# EAGLE board afron_atmega328_PTH (EAGLE 6.1)
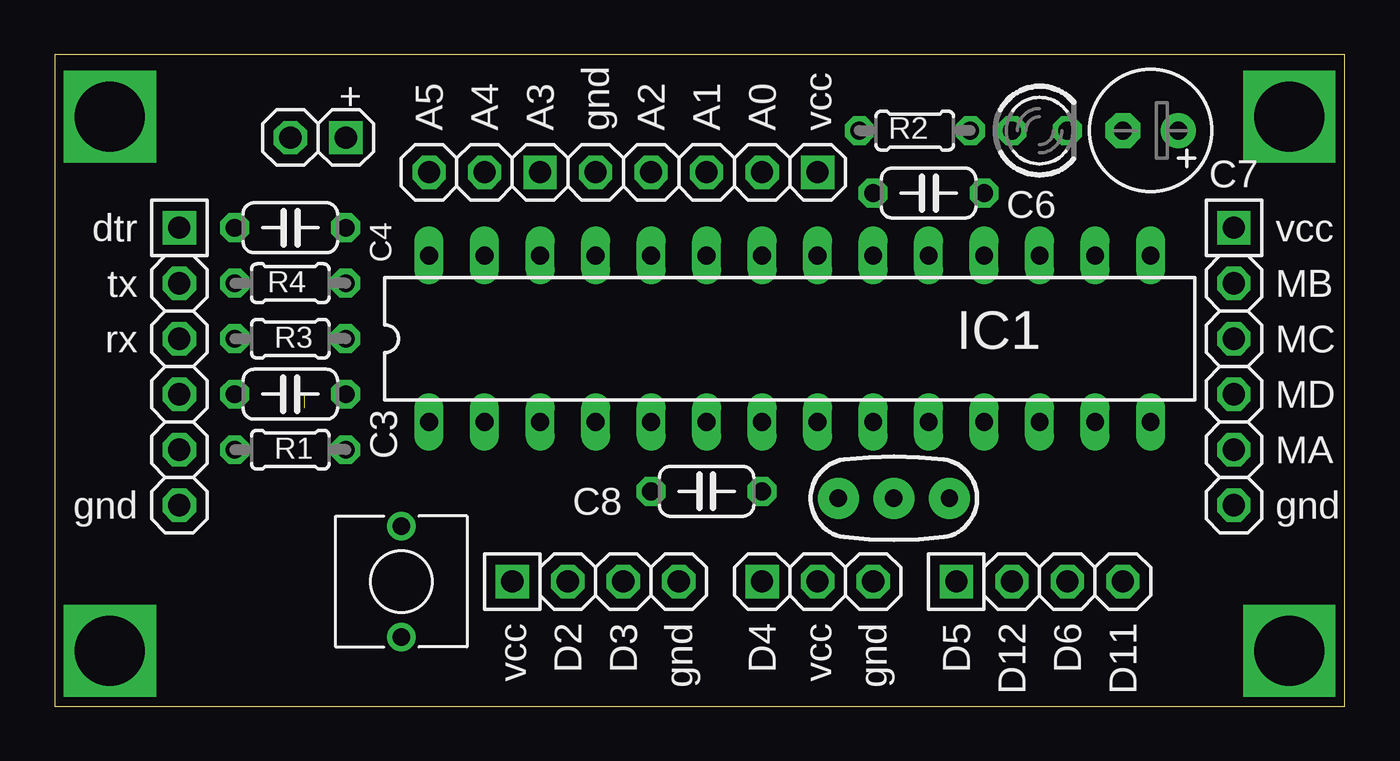
[diagram p0: board, top side]
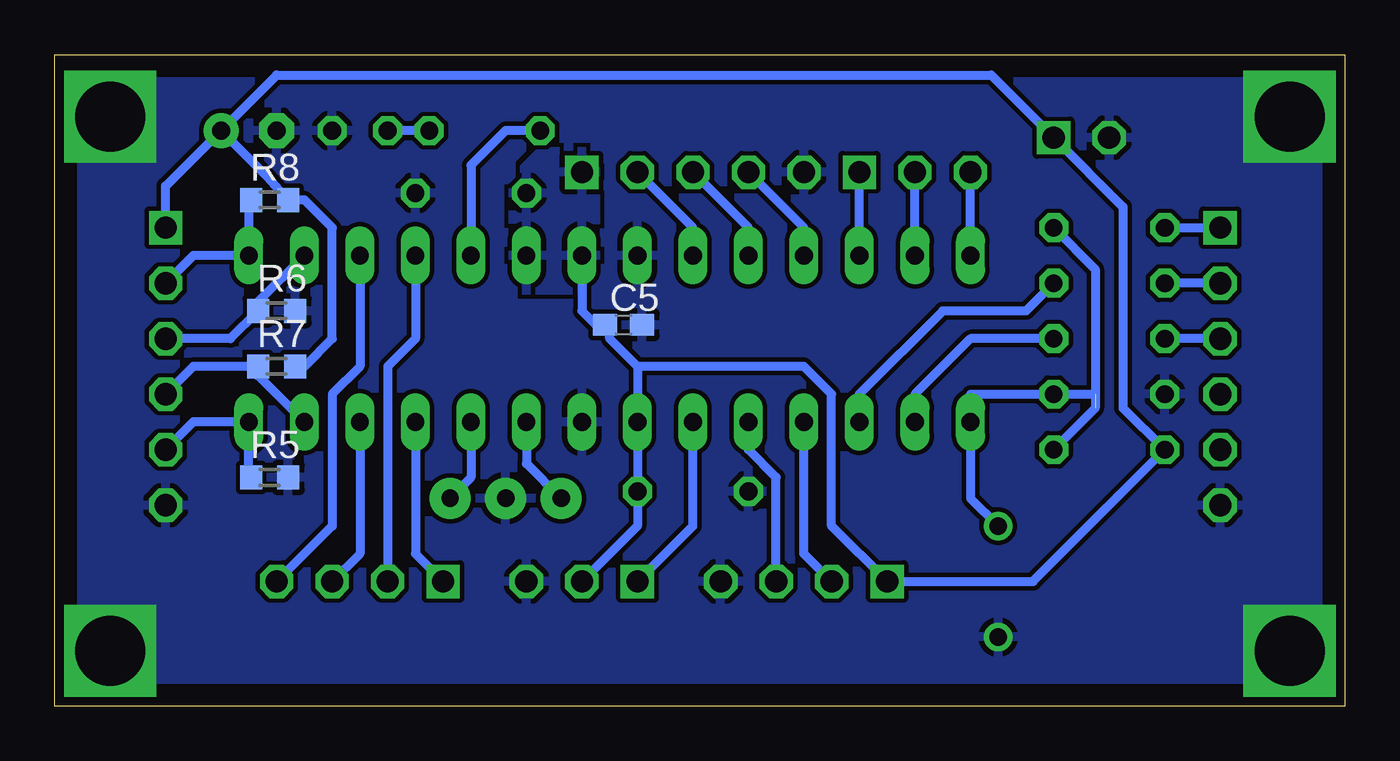
[diagram p1: board, bottom side, seen from below]

Size 59.05 x 29.83 mm. Coordinates in mm from the lower left corner, seen from the top.
Outline: 59.05,0 59.05,29.83 0,29.83 0,0 59.05,0
Copper layers (1*16): Top 0.035mm / dielectric 1.5mm / Bottom 0.035mm
Design rules: minimum track width 10mil, minimum drill 24mil, track to track 8mil, track to pad 8mil, pad to pad 8mil, via to via 8mil, smd to smd 8mil, copper to edge 40mil, drill to drill 8mil, minimum pad ring 10mil, minimum via ring 8mil, stop-mask expansion 4mil, vias tented up to drill 0mil, thermal gap 10mil

## Footprints (pad centres in the part's own frame; a part is rotated, then mirrored left to right if it is on the bottom)
C050-024X044 = drill 0.813 octagon: 1 -2.54,0; 2 2.54,0
C0603 = smd 1.1 x 1: 1 -0.85,0; 2 0.85,0
E2,5-6 = drill 0.813 pad 1.6: + -1.27,0 | drill 0.813 pad 1.6 octagon: - 1.27,0
DIL28-3 = drill 0.813 long: 1 -16.51,-3.81; 2 -13.97,-3.81; 3 -11.43,-3.81; 4 -8.89,-3.81; 5 -6.35,-3.81; 6 -3.81,-3.81; 7 -1.27,-3.81; 8 1.27,-3.81; 9 3.81,-3.81; 10 6.35,-3.81; 11 8.89,-3.81; 12 11.43,-3.81; 13 13.97,-3.81; 14 16.51,-3.81; 15 16.51,3.81; 16 13.97,3.81; 17 11.43,3.81; 18 8.89,3.81; 19 6.35,3.81; 20 3.81,3.81; 21 1.27,3.81; 22 -1.27,3.81; 23 -3.81,3.81; 24 -6.35,3.81; 25 -8.89,3.81; 26 -11.43,3.81; 27 -13.97,3.81; 28 -16.51,3.81
1X06-S = drill 1.016 square: 1 -6.35,0 | drill 1.016 octagon: 2 -3.81,0; 3 -1.27,0; 4 1.27,0; 5 3.81,0; 6 6.35,0
1X04-S = drill 1.016 square: 1 -3.81,0 | drill 1.016 octagon: 2 -1.27,0; 3 1.27,0; 4 3.81,0
1X05-S = drill 1.016 square: 1 -5.08,0 | drill 1.016 octagon: 2 -2.54,0; 3 0,0; 4 2.54,0; 5 5.08,0
1X02-S = drill 1.016 square: 1 -1.27,0 | drill 1.016 octagon: 2 1.27,0
1X03-S = drill 1.016 square: 1 -2.54,0 | drill 1.016 octagon: 2 0,0; 3 2.54,0
LED3MM = drill 0.813 octagon: A -1.27,0; K 1.27,0
0204/5 = drill 0.813 octagon: 1 -2.54,0; 2 2.54,0
R0603 = smd 1 x 1.1: 1 -0.85,0; 2 0.85,0
6MMTACTILE = drill 0.8: P$1 -2.54,0; P$2 2.54,0
RESONATOR-PTH = drill 0.8 pad 1.88: 1 -2.54,0; 2 0,0; 3 2.54,0

## Placement (x,y rotation side)
C3  0.1uF  [C050-024X044]  10.79,14.29 180 top
C4  0.1uF  [C050-024X044]  10.79,21.91 0 top
C5  0.1uF  [C0603]  33.01,17.46 0 bottom
C6  0.1uF  [C050-024X044]  40,23.5 0 top
C7  10uF  [E2,5-6]  50.16,26.35 180 top
C8  0.1uF  [C050-024X044]  29.83,9.84 180 top
IC1  ATMEGA328P  [DIL28-3]  33.65,16.83 0 top
JP1  [1X06-S]  5.71,15.56 270 top
JP2  SWITCH  [1X04-S]  24.75,5.71 0 top
JP3  SENSOR  [1X05-S]  29.83,24.45 180 top
JP4  PWR  [1X02-S]  12.05,26.04 180 top
JP5  SRV  [1X03-S]  34.91,5.71 0 top
JP6  MOTOR  [1X06-S]  53.97,15.56 270 top
JP7  A  [1X04-S]  45.08,5.71 0 top
JP8  B  [1X03-S]  19.67,24.45 180 top
LED4  [LED3MM]  45.08,26.35 0 top
R1  1K  [0204/5]  10.79,11.75 180 top
R2  330  [0204/5]  39.36,26.35 180 top
R3  1K  [0204/5]  10.79,16.83 0 top
R4  1K  [0204/5]  10.79,19.37 0 top
R5  10K  [R0603]  49.2,10.48 0 bottom
R6  10K  [R0603]  48.89,18.1 0 bottom
R7  10K  [R0603]  48.89,15.56 0 bottom
R8  10K  [R0603]  49.2,23.18 0 bottom
S1  RESET  [6MMTACTILE]  15.87,5.71 90 top
Y1  4MHz  [RESONATOR-PTH]  38.41,9.53 0 top

## Library data of the parts
C3-C8 = rcl
IC1 = Arduino-AVR
JP1-JP8 = pinhead-2
LED4 = led
R1-R8 = resistor
S1 = mes_electromech
Y1 = SparkFun

## Nets
!RESET: C3.1 C4.2 IC1.1 R1.1 S1.P$2
A0: IC1.23 JP3.2
A1: IC1.24 JP3.3
A2: IC1.25 JP3.4
A3: IC1.26 JP8.1
A4: IC1.27 JP8.2
A5: IC1.28 JP8.3
D2: IC1.4 JP2.2
D3: IC1.5 JP2.3
D4: IC1.6 JP5.1
D5: IC1.11 JP7.1
D6: IC1.12 JP7.3
D11: IC1.17 JP7.4
D12: IC1.18 JP7.2
D13: IC1.19 R2.2
GND: C3.2 C5.2 C6.2 C7.- C8.2 IC1.8 IC1.22 JP1.6 JP2.4 JP3.5 JP4.2 JP5.3 JP6.6 LED4.K R5.2 R6.2 S1.P$1 Y1.2
MOTOR_A: IC1.14 JP6.5 R5.1
MOTOR_B: IC1.15 JP6.2 R8.1
MOTOR_C: IC1.16 JP6.3 R6.1
MOTOR_D: IC1.13 JP6.4 R7.1
N$2: IC1.9 Y1.1
N$3: IC1.10 Y1.3
N$4: C4.1 JP1.1
N$6: LED4.A R2.1
N$8: IC1.3 R4.2
N$9: IC1.2 R3.2
RX: JP1.3 R3.1
TX: JP1.2 R4.1
VCC: C5.1 C6.1 C7.+ C8.1 IC1.7 IC1.20 IC1.21 JP2.1 JP3.1 JP4.1 JP5.2 JP6.1 R1.2 R7.2 R8.2

## Tracks (layer width: path | path; a pad name or v marks a point on that pad's centre or on a via)
!RESET  (1 unrouted)
  Bottom 0.406: C4.2 11.42,20 11.42,13.65 R1.1 | S1.P$2 17.13,9.53 IC1.1 17.13,14.29 C3.1 11.42,14.29
A0
  Bottom 0.406: JP3.2 29.83,21.91 IC1.23
A1
  Bottom 0.406: JP3.3 27.29,21.91 IC1.24
A2
  Bottom 0.406: JP3.4 24.75,21.91 IC1.25
A3
  Bottom 0.406: IC1.26 JP8.1
A4
  Bottom 0.406: IC1.27 JP8.2
A5
  Bottom 0.406: IC1.28 JP8.3
D2
  Bottom 0.406: JP2.2 24.75,6.99 IC1.4
D3
  Bottom 0.406: JP2.3 26.02,10.48 27.29,11.75 IC1.5
D4
  Bottom 0.406: JP5.1 29.83,8.26 IC1.6
D5
  Bottom 0.406: IC1.11 42.54,6.99 JP7.1
D6
  Bottom 0.406: IC1.12 45.08,6.99 JP7.3
D11
  Bottom 0.406: IC1.17 45.08,15.56 46.34,14.29 46.34,8.26 JP7.4
D12
  Bottom 0.406: IC1.18 42.54,16.83 43.8,15.56 JP7.2
D13
  Bottom 0.406: R2.2 38.41,26.35 40,24.77 IC1.19
GND  (via drill 3.2)
  other vias: 2.53,2.54 2.53,26.99 56.51,26.99 56.51,2.54
  pour Bottom (rank 3): -0.01,0 -0.01,30.16 59.05,30.16 59.05,0
MOTOR_A
  Bottom 0.406: JP6.5 52.7,13.02 IC1.14 50.16,10.69 R5.1
MOTOR_B
  Bottom 0.406: JP6.2 52.7,20.64 IC1.15 50.16,22.96 R8.1
MOTOR_C
  Bottom 0.406: JP6.3 51.01,16.83 R6.1 49.73,18.52 IC1.16
MOTOR_D
  Bottom 0.406: JP6.4 52.7,15.56 R7.1 49.73,15.14 IC1.13
N$2
  Bottom 0.406: IC1.9 37.46,11.11 Y1.1
N$3
  Bottom 0.406: IC1.10 40,10.48 Y1.3
N$4
  Bottom 0.406: C4.1 JP1.1
N$6
  Bottom 0.406: R2.1 LED4.A
N$8
  Bottom 0.406: R4.2 14.6,18.1 18.4,18.1 22.21,14.29 IC1.3
N$9
  Bottom 0.406: R3.2 17.13,16.83 19.67,14.29 IC1.2
RX
  Bottom 0.406: JP1.3 R3.1
TX
  Bottom 0.406: JP1.2 R4.1
VCC
  Bottom 0.406: IC1.21 34.91,18.1 34.28,17.46 C5.1 33.65,17.25 33.65,16.83 32.38,15.56 | 32.38,15.56 IC1.7 C8.1 32.38,8.26 JP5.2 | 32.38,15.56 24.75,15.56 23.48,14.29 23.48,8.26 JP2.1 14.28,5.71 R1.2 10.15,13.65 10.15,22.86 JP4.1 16.18,28.89 48.89,28.89 C7.+ | R7.2 47.62,15.56 46.34,16.83 46.34,21.91 47.62,23.18 R8.2 49.3,24.23 C7.+ | JP6.1 53.97,23.81 C7.+
  pour Bottom: 34.28,25.4 36.82,25.4 38.09,24.13 38.09,19.05 34.28,19.05

## Text on the board
tNames: + | A5 | A4 | A3 | gnd | A2 | A1 | A0 | vcc | dtr | vcc | tx | MB | rx | MC | MD | MA | gnd | gnd | vcc | D2 | D3 | gnd | D4 | vcc | gnd | D5 | D12 | D6 | D11